# Altium PCB RF-UNIT.PcbDoc (part 4 of 4)
Units mm, origin at the board's own origin, x right, y up, seen from the top; angles counter-clockwise.
Board outline 187 x 77 mm, 2 copper layers (Top Layer, Top, Bottom Layer, Bottom); 271 components, 171 nets, 804 pads, 2169 vias.
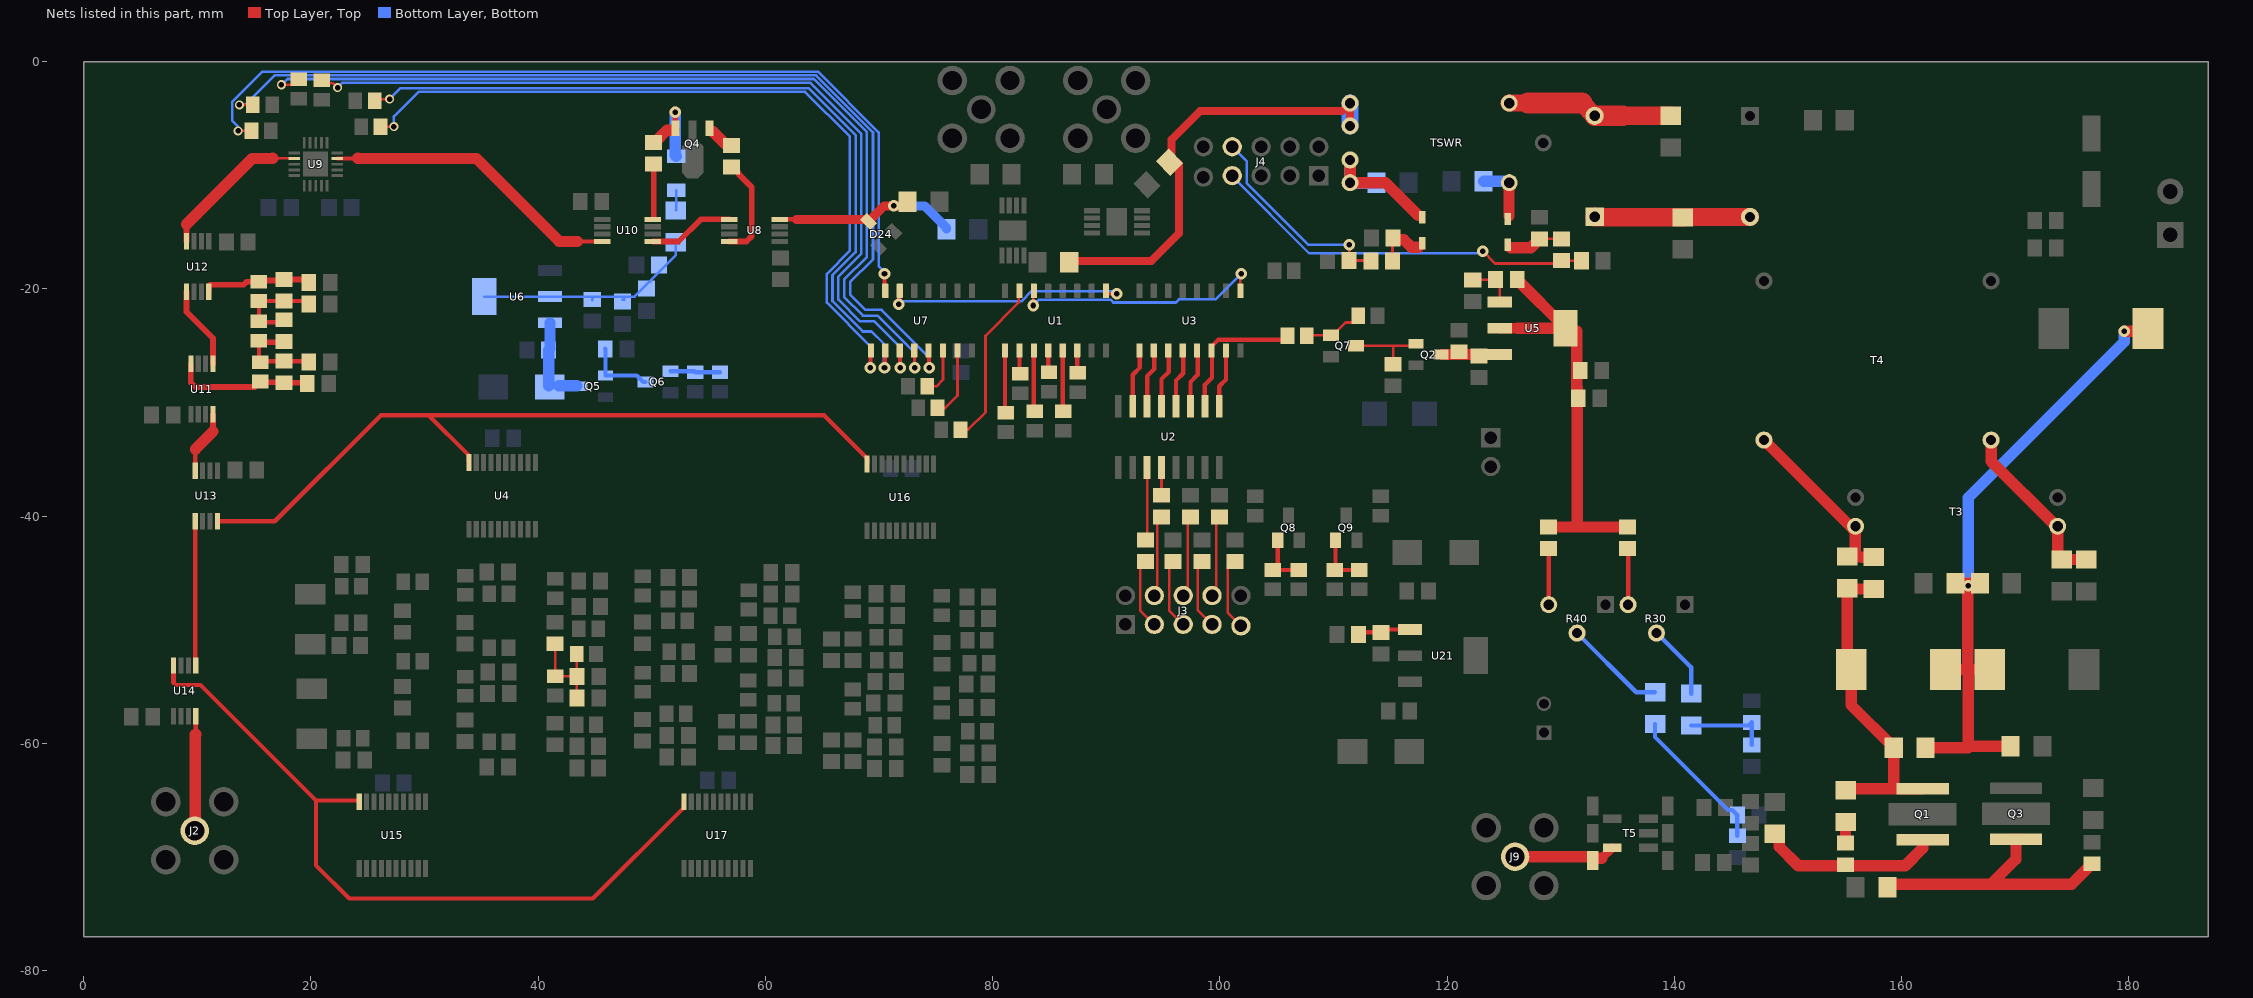
[diagram p4: the nets of this part, all layers, seen from the top]

## Via types
v1: diameter 0.5, hole 0.3, Top Layer, Top to Bottom Layer, Bottom, tented both sides, 1697 vias
v2: diameter 0.5, hole 0.3, Top Layer, Top to Bottom Layer, Bottom, 318 vias
v3: diameter 1.016, hole 0.486, Top Layer, Top to Bottom Layer, Bottom, tented both sides, 136 vias
v4: diameter 0.8, hole 0.486, Top Layer, Top to Bottom Layer, Bottom, tented both sides, 12 vias
v5: diameter 4, hole 3, Top Layer, Top to Bottom Layer, Bottom, 4 vias
v6: diameter 3.2, hole 3, Top Layer, Top to Bottom Layer, Bottom, 2 vias

## Nets (pads, with @x,y where several pads share a name; then routed paths per layer and width w, separated by ;. In a path a pad name is that pad's centre, name@x,y a point inside that pad or via, vN(x,y) a via of type N, cw(c..) or ccw(c..) an arc to the next point about the centre after c; other vN are vias at no path point) (continued)
NetC91_1: C91.1 C92.1 C111.2 L37.1 Q1.1 R48.2 | length 28.8
  Top Layer, Top w1: C111.2@154.778,-64.132 154.918,-63.993 159.306,-63.993 ; C92.1@157.533,-46.408 155.28,-46.408 C91.1@155.219,-46.346 155.219,-53.152 L37.1@155.562,-53.496 155.562,-56.627 R48.2@159.306,-60.371 159.306,-63.993 ; Q1.1@161.852,-63.993 159.306,-63.993
NetC91_2: C91.2 C92.2 T3.4 T4.1 | length 15.4
  Top Layer, Top w0.381: C91.2@155.881,-43.577 C91.2@155.929,-43.53 ; T3.4@155.929,-40.921 T3.4@155.956,-40.894
  Top Layer, Top w1: T4.1@147.881,-33.302 T3.4@155.714,-41.136 ; C91.2@155.881,-43.577 156.544,-43.608 C92.2@157.533,-43.608 ; C91.2@155.929,-43.53 T3.4@155.929,-40.921
NetC93_2: C93.2 C94.2 T3.1 T4.3 | length 15.4
  Top Layer, Top w0.381: C94.2@173.736,-43.441 C94.2@174.108,-43.813
  Top Layer, Top w1: T4.3@167.881,-33.302 167.881,-35.166 173.609,-40.894 T3.1@173.609,-41.148 ; C94.2@173.736,-43.441 T3.1@173.736,-40.894 ; C94.2@174.108,-43.813 176.241,-43.813 C93.2@176.257,-43.829
NetC95_1: C95.1 C105.1 L37.2 L38.1 L43.1 R47.2 R48.1 | length 58.6
  Top Layer, Top w1: R48.1@162.106,-60.371 165.853,-60.371 165.853,-60.246 ; L37.2@163.862,-53.496 165.853,-53.496 ; C95.1@164.738,-45.911 164.751,-45.898 v3@165.813,-45.898 ; v3(165.853,-46.131) 165.844,-46.08 v3@165.813,-45.898 ; C105.1@166.891,-45.898 v3@165.813,-45.898 ; L38.1@167.748,-53.491 167.743,-53.496 166.068,-53.496 ; R47.2@169.592,-60.246 165.853,-60.246 ; v3(179.584,-23.716) 181.449,-23.716 L43.1@181.685,-23.481 ; v3@165.813,-45.898 165.813,-53.24 166.068,-53.496 ; 165.853,-60.246 165.853,-53.496 ; 165.853,-53.496 166.068,-53.496
  Bottom Layer, Bottom w1: v3(165.853,-46.131) 165.853,-38.394 179.584,-24.664 v3(179.584,-23.716)
NetC101_1: C101.1 C102.2 C107.2 L40.2 L41.1 | length 8.5
  Top Layer, Top w0.381: C102.2@17.653,-22.926 15.496,-22.926 L41.1@15.43,-22.86 L40.2@15.43,-21.068 17.651,-21.068 C101.1@17.653,-21.07 19.406,-21.07 C107.2@19.739,-21.402
NetC101_2: C101.2 C104.2 L40.1 U12.8 | length 9.6
  Top Layer, Top w0.5: U12.8@11.008,-20.259 11.008,-19.759 11.118,-19.649 14.079,-19.649 14.361,-19.367 L40.1@15.43,-19.367 15.529,-19.269 17.554,-19.269 C101.2@17.653,-19.17 19.543,-19.17 C104.2@19.805,-19.431
NetC102_1: C102.1 C103.2 C108.2 L41.2 L42.1 | length 8.5
  Top Layer, Top w0.381: L41.2@15.43,-24.56 15.43,-26.352 15.433,-26.355 C103.2@17.651,-26.355 19.744,-26.355 C108.2@19.805,-26.416
  Top Layer, Top w0.5: L41.2@15.43,-24.56 15.563,-24.693 17.52,-24.693 C102.1@17.653,-24.826
NetC103_1: C103.1 C110.2 L42.2 U11.8 | length 12.3
  Top Layer, Top w0.5: U11.8@9.439,-26.604 9.439,-28.235 9.844,-28.64 15.048,-28.64 L42.2@15.533,-28.155 15.583,-28.205 17.601,-28.205 C103.1@17.651,-28.255 19.612,-28.255 C110.2@19.678,-28.321
NetC111_1: C111.1 R32.2 | length 0.4
  Top Layer, Top w1: 155.067,-68.084 C111.1@155.067,-67.701
NetC112_1: C112.1 Q4.1 | length 2.1
  Top Layer, Top w1: Q4.1@55.419,-6.176 55.419,-6.201 56.446,-7.228 56.873,-7.228 C112.1@57.023,-7.378
NetC112_2: C112.2 U8.8 | length 9
  Top Layer, Top w0.5: U8.8@56.83,-15.834 58.334,-15.834 58.801,-15.367 58.801,-11.056 57.658,-9.913 57.658,-9.813 57.123,-9.278 C112.2@57.023,-9.278
NetC113_1: C113.1 D1.1 R49.1 | length 4.8
  Top Layer, Top w0.23: C113.1@128.132,-15.604 130.071,-15.604 R49.1@130.078,-15.611
  Top Layer, Top w1: D1.1@125.603,-16.377 127.359,-16.377 C113.1@128.132,-15.604
NetC114_1: C114.1 D18.1 R27.1 | length 7.4
  Bottom Layer, Bottom w0.381: D18.1@141.478,-58.423 146.543,-58.423 C114.1@146.812,-58.154 R27.1@146.812,-60.137
NetC116_1: C116.1 D23.1 R44.1 | length 13.1
  Bottom Layer, Bottom w0.381: D23.1@138.303,-58.296 138.303,-59.436 144.726,-65.859 145.095,-65.859 145.542,-66.306 R44.1@145.542,-68.138
NetC117_2: C117.2 D3.1 R50.1 | length 4.6
  Top Layer, Top w0.23: R50.1@115.196,-17.542 115.196,-15.573 C117.2@115.236,-15.533
  Top Layer, Top w1: C117.2@115.236,-15.533 115.236,-15.649 116.169,-15.649 116.846,-16.325 117.452,-16.325
NetC120_1: C120.1 U10.8 | length 4.9
  Top Layer, Top w0.23: U10.8@50.104,-13.884 U10.8@50.165,-13.823
  Top Layer, Top w0.5: U10.8@50.165,-13.823 C120.1@50.165,-9.005
NetC120_2: C120.2 L46.2 Q4.3 | length 7.5
  Top Layer, Top w0.5: Q4.3@52.073,-5.831 v3@52.073,-4.448
  Top Layer, Top w1: C120.2@50.165,-7.105 50.265,-7.105 51.343,-6.027 Q4.3@51.944,-6.027 ; v3(52.07,-4.445) v3@52.073,-4.448
  Bottom Layer, Bottom w1: v3(52.07,-4.445) 52.073,-4.448 52.073,-8.237 L46.2@52.157,-8.322
NetC121_2: C121.2 C122.2 C127.2 C133.2 R39.1 U6.2 U6.4 | length 20.3
  Bottom Layer, Bottom w0.23: U6.4@35.246,-20.68 C133.2@44.86,-20.68 ; C133.2@44.751,-20.981 44.751,-20.946 C133.2@44.765,-20.932 C133.2@44.86,-20.68 ; C121.2@47.416,-20.957 47.586,-20.957 C121.2@47.586,-20.68 ; C122.2@49.842,-19.363 C122.2@49.842,-19.324 ; C127.2@51.216,-17.943 C127.2@51.222,-17.943 ; R39.1@52.111,-15.892 52.111,-17.054 C127.2@51.222,-17.943 ; C133.2@44.86,-20.68 C121.2@47.586,-20.68 ; C121.2@47.586,-20.68 48.485,-20.68 C122.2@49.842,-19.324 ; C122.2@49.842,-19.324 C127.2@51.222,-17.943
NetC124_2: C124.2 L44.2 L45.1 | length 21.5
  Top Layer, Top w1.6: C124.2@140.74,-13.711 132.988,-13.711 L45.1@132.988,-13.659 L44.2@146.654,-13.665
NetC126_2: C126.2 C136.2 Q2.3 U5.3 | length 7
  Top Layer, Top w0.23: Q2.3@119.577,-25.77 119.843,-25.503 C126.2@121.404,-25.503 ; U5.3@124.617,-25.77 U5.3@124.624,-25.763
  Top Layer, Top w1: Q2.3@119.577,-25.77 121.404,-25.77 122.809,-25.77 123.063,-25.77 U5.3@124.617,-25.77
NetC128_1: C128.1 C137.1 R28.2 R29.2 R52.1 U5.2 U5.4 | length 37.1
  Top Layer, Top w0.95: U5.2@124.624,-23.463 126.199,-23.463
  Top Layer, Top w1: 126.199,-23.463 U5.4@130.424,-23.463 ; R52.1@126.212,-19.239 130.424,-23.451 U5.4@130.424,-23.463 ; R29.2@128.905,-40.96 131.445,-40.96 ; R28.2@135.89,-40.96 131.445,-40.96 ; U5.4@130.424,-23.463 130.67,-23.709 131.421,-23.709 131.421,-27.178 131.421,-28.674 131.443,-28.674 131.444,-35.56 131.444,-40.959 131.445,-40.96
NetC129_1: C129.1 C130.2 Q5.3 U6.3 | length 7.3
  Bottom Layer, Bottom w0.381: C129.1@41.815,-28.638 C129.1@41.815,-28.524
  Bottom Layer, Bottom w0.95: 41.046,-23.955 U6.3@41.046,-22.98
  Bottom Layer, Bottom w1: C129.1@40.92,-28.522 C130.2@40.92,-25.387 41.046,-25.261 41.046,-23.955 ; C129.1@41.815,-28.524 Q5.3@43.401,-28.524
NetD1_2: D1.2 R56.1 TSWR.3 | length 5.2
  Top Layer, Top w1: D1.2@125.452,-13.577 125.452,-10.653 TSWR.3@125.466,-10.653
  Bottom Layer, Bottom w1: R56.1@123.227,-10.525 125.339,-10.525 TSWR.3@125.466,-10.653
NetD3_2: D3.2 R55.1 TSWR.4 TSWR.6 | length 13.5
  Top Layer, Top w1: TSWR.6@111.466,-8.653 TSWR.4@111.466,-10.653 114.579,-10.653 117.452,-13.525
  Bottom Layer, Bottom w1: TSWR.6@111.466,-8.653 TSWR.4@111.466,-10.653 111.538,-10.725 R55.1@113.762,-10.725
NetD18_2: D18.2 R30.2 | length 6.6
  Bottom Layer, Bottom w0.381: R30.2@138.43,-50.257 141.478,-53.305 D18.2@141.478,-55.623
NetD23_2: D23.2 R40.2 | length 9
  Bottom Layer, Bottom w0.381: R40.2@131.445,-50.292 136.649,-55.496 D23.2@138.303,-55.496
NetJ3_3: J3.3 R3.1 | length 6.3
  Top Layer, Top w0.23: R3.1@93.472,-44.003 93.453,-44.003 92.993,-44.463 92.993,-48.289 J3.3@94.234,-49.53
NetJ3_4: J3.4 R7.1 | length 7.2
  Top Layer, Top w0.23: J3.4@94.234,-46.99 94.234,-46.633 94.501,-46.366 94.501,-40.434 R7.1@94.869,-40.066
NetJ3_5: J3.5 R8.1 | length 6.4
  Top Layer, Top w0.23: R8.1@96.139,-44.003 96.039,-44.003 95.533,-44.509 95.533,-48.289 J3.5@96.774,-49.53
NetJ3_6: J3.6 R9.1 | length 7.2
  Top Layer, Top w0.23: J3.6@96.774,-46.99 96.774,-46.633 97.168,-46.239 97.168,-40.307 R9.1@97.409,-40.066
NetJ3_7: J3.7 R10.1 | length 6.4
  Top Layer, Top w0.23: R10.1@98.679,-44.003 98.579,-44.003 98.119,-44.463 98.119,-44.563 98.044,-44.638 98.044,-48.26 J3.7@99.314,-49.53
NetJ3_8: J3.8 R11.1 | length 7.2
  Top Layer, Top w0.23: J3.8@99.314,-46.99 99.314,-46.633 99.695,-46.252 99.695,-40.32 R11.1@99.949,-40.066
NetJ3_9: J3.9 R12.1 | length 6.5
  Top Layer, Top w0.23: R12.1@101.346,-44.003 101.246,-44.003 100.689,-44.56 100.689,-48.492 J3.9@101.854,-49.657
NetL46_1: L46.1 R39.2 | length 1.8
  Bottom Layer, Bottom w0.23: R39.2@52.111,-13.092 52.157,-13.045 L46.1@52.157,-11.322
NetQ1_3: Q1.3 R32.1 R34.2 | length 16
  Top Layer, Top w1: R34.2@149.225,-67.818 149.225,-69.088 150.908,-70.771 154.796,-70.771 155.067,-70.771 160.317,-70.771 161.852,-69.237 Q1.3@161.852,-68.493
NetQ2_1: Q2.1 Q7.3 R41.1 | length 7
  Top Layer, Top w0.23: Q7.3@111.971,-25.019 115.316,-25.019 ; R41.1@115.259,-26.632 115.259,-25.076 115.316,-25.019 ; Q2.1@117.039,-24.606 116.835,-24.811 116.835,-25.019 115.316,-25.019
NetQ3_3: Q3.3 R38.2 R46.1 | length 32.7
  Top Layer, Top w1: Q3.3@170.076,-68.453 170.076,-70.189 167.88,-72.385 ; R46.1@176.765,-70.599 174.978,-72.385 167.88,-72.385 ; 167.88,-72.385 158.75,-72.39 167.88,-72.385
NetQ5_1: Q5.1 Q6.3 R57.1 | length 6.1
  Bottom Layer, Bottom w0.381: R57.1@45.913,-25.273 45.931,-25.291 Q5.1@45.931,-27.625 48.677,-27.625 49.246,-28.194 Q6.3@49.446,-28.194
NetQ6_1: Q6.1 R31.1 R33.2 | length 4.4
  Bottom Layer, Bottom w0.381: Q6.1@51.646,-27.244 53.748,-27.244 R33.2@53.848,-27.344 R31.1@56.007,-27.344
NetQ7_1: Q7.1 R37.1 R45.2 | length 5.3
  Top Layer, Top w0.23: R37.1@107.657,-24.13 107.718,-24.069 Q7.1@109.771,-24.069 109.971,-24.069 111.078,-22.962 111.695,-22.962 112.18,-22.477 R45.2@112.18,-22.352
NetQ8_1: Q8.1 R65.1 R70.2 | length 5.1
  Top Layer, Top w0.381: R65.1@104.648,-44.743 R65.1@104.685,-44.743 ; Q8.1@105.095,-42.121 105.095,-44.333 R65.1@104.685,-44.743 ; R70.2@106.934,-44.743 R65.1@104.685,-44.743
NetQ9_1: Q9.1 R5.1 R6.2 | length 4.8
  Top Layer, Top w0.381: Q9.1@110.175,-42.121 110.175,-44.677 R5.1@110.109,-44.743 R6.2@112.268,-44.743
NetR1_1: R1.1 R2.1 U21.1 | length 4.7
  Top Layer, Top w0.381: R2.1@112.202,-50.419 112.39,-50.231 R1.1@114.173,-50.231 114.422,-49.982 U21.1@116.734,-49.982
NetR28_1: R28.1 R30.3 | length 4.9
  Top Layer, Top w0.381: R28.1@135.89,-42.86 135.93,-42.9 R30.3@135.93,-47.757
NetR29_1: R29.1 R40.3 | length 4.9
  Top Layer, Top w0.381: R29.1@128.905,-42.86 128.945,-42.9 R40.3@128.945,-47.792
NetR52_2: R52.2 R53.1 U5.1 | length 4.1
  Top Layer, Top w0.23: R53.1@122.258,-19.207 124.279,-19.207 124.312,-19.239 124.624,-19.551 U5.1@124.624,-21.163
NetR71_2: R71.2 U1.15 | length 14.3
  Top Layer, Top w0.23: R71.2@77.177,-32.385 77.851,-32.385 79.375,-30.861 79.375,-24.129 82.296,-21.208 U1.15@82.296,-20.584
NetR72_2: R72.2 U1.1 | length 5.5
  Top Layer, Top w0.381: U1.1@81.093,-25.418 81.093,-30.84 R72.2@81.153,-30.9
NetR73_2: R73.2 U1.2 | length 2.1
  Top Layer, Top w0.381: U1.2@82.363,-25.418 82.363,-27.411 R73.2@82.423,-27.471
NetR74_2: R74.2 U1.3 | length 5.4
  Top Layer, Top w0.381: U1.3@83.633,-25.418 83.633,-30.713 R74.2@83.693,-30.773
NetR75_2: R75.2 U1.4 | length 2
  Top Layer, Top w0.381: U1.4@84.903,-25.418 84.903,-27.284 R75.2@84.963,-27.344
NetR76_2: R76.2 U1.5 | length 5.4
  Top Layer, Top w0.381: U1.5@86.173,-25.418 86.173,-30.713 R76.2@86.233,-30.773
NetR77_2: R77.2 U1.6 | length 2
  Top Layer, Top w0.381: U1.6@87.443,-25.418 87.443,-27.323 R77.2@87.503,-27.383
NetR78_2: R78.2 U7.15 | length 78.3
  Top Layer, Top w0.23: v4(13.589,-6.096) R78.2@14.771,-6.096
  Top Layer, Top w0.381: v3(70.485,-18.669) 70.485,-20.095 U7.15@70.558,-20.168
  Bottom Layer, Bottom w0.23: v4(13.589,-6.096) 13.589,-5.715 13.074,-5.2 13.074,-3.544 15.729,-0.889 64.643,-0.889 69.977,-6.223 69.977,-17.971 70.485,-18.479 v3(70.485,-18.669)
NetR79_2: R79.2 U7.1 | length 68.9
  Top Layer, Top w0.23: R79.2@26.123,-5.715 v4(27.305,-5.715)
  Top Layer, Top w0.381: v3@69.252,-26.887 U7.1@69.252,-25.455
  Bottom Layer, Bottom w0.23: v4(27.305,-5.715) 27.305,-4.826 29.477,-2.654 63.487,-2.654 67.437,-6.604 67.437,-16.637 65.405,-18.669 65.405,-21.209 69.215,-25.019 v3(69.215,-26.924)
NetR80_2: R80.2 U7.2 | length 69.3
  Top Layer, Top w0.23: R80.2@25.615,-3.429 25.742,-3.302 v4(26.924,-3.302)
  Top Layer, Top w0.381: v3@70.522,-26.583 70.522,-25.455 U7.2@70.558,-25.418
  Bottom Layer, Bottom w0.23: v4(26.924,-3.302) 27.891,-2.335 63.803,-2.335 67.945,-6.477 67.945,-16.764 65.913,-18.796 65.913,-21.082 68.58,-23.749 69.342,-23.749 70.419,-24.826 70.419,-26.858 v3(70.485,-26.924)
NetR81_2: R81.2 U7.3 | length 75.8
  Top Layer, Top w0.23: R81.2@20.955,-1.651 21.209,-1.905 21.971,-1.905 v4(22.352,-2.286)
  Top Layer, Top w0.381: U7.3@71.828,-25.418 71.855,-25.445 71.855,-26.897 v3(71.882,-26.924)
  Bottom Layer, Bottom w0.23: v4(22.352,-2.286) 22.792,-1.846 63.949,-1.846 68.453,-6.35 68.453,-16.891 66.421,-18.923 66.421,-20.955 68.326,-22.86 69.596,-22.86 71.882,-25.146 v3(71.882,-26.924)
NetR82_2: R82.2 U7.4 | length 81.8
  Top Layer, Top w0.23: v4(17.399,-2.032) 18.376,-2.032 18.884,-1.524 R82.2@18.923,-1.563 ; U7.4@73.098,-25.418 73.125,-25.445 73.125,-26.897 v3(73.152,-26.924)
  Bottom Layer, Bottom w0.23: v4(17.399,-2.032) 17.442,-2.032 17.947,-1.527 64.265,-1.527 68.926,-6.188 68.926,-17.18 66.929,-19.177 66.929,-20.701 68.58,-22.352 69.85,-22.352 73.152,-25.654 v3(73.152,-26.924)
NetR83_2: R83.2 U7.5 | length 86.8
  Top Layer, Top w0.23: v4(13.716,-3.81) R83.2@14.898,-3.81
  Top Layer, Top w0.381: U7.5@74.368,-25.418 74.395,-25.445 v3@74.395,-26.897
  Bottom Layer, Bottom w0.23: v4(13.716,-3.81) 14.205,-3.81 16.807,-1.208 64.454,-1.208 69.469,-6.223 69.469,-17.399 67.468,-19.4 67.468,-20.478 68.834,-21.844 70.231,-21.844 74.422,-26.035 v3(74.422,-26.924)
NetR84_2: R84.2 U7.6 | length 4.2
  Top Layer, Top w0.23: R84.2@74.256,-28.575 75.057,-28.575 75.638,-27.994 U7.6@75.638,-25.418
NetR85_2: R85.2 U7.7 | length 6.2
  Top Layer, Top w0.23: R85.2@75.145,-30.48 75.819,-30.48 76.908,-29.391 U7.7@76.908,-25.418
NetU1_9: U1.9 U7.14 | length 22.1
  Top Layer, Top w0.23: U1.9@89.983,-20.168 89.983,-20.287 90.143,-20.447 v3(90.932,-20.447)
  Top Layer, Top w0.381: v3(71.755,-21.336) 71.792,-21.299 71.792,-20.205 U7.14@71.828,-20.168
  Bottom Layer, Bottom w0.23: v3(71.755,-21.336) 71.997,-21.094 82.538,-21.094 83.439,-20.193 90.678,-20.193 v3(90.932,-20.447)
NetU1_14: U1.14 U3.9 | length 22.5
  Top Layer, Top w0.23: v3(83.566,-21.463) 83.566,-20.16 U1.14@83.633,-20.093 ; U3.9@101.807,-20.093 101.807,-18.738 v3(101.868,-18.676)
  Bottom Layer, Bottom w0.23: v3(83.566,-21.463) 84.074,-20.955 90.379,-20.955 90.621,-21.197 96.136,-21.197 96.405,-20.928 99.617,-20.928 v3(101.868,-18.676)
NetU2_1: U2.1 U3.7 | length 5.1
  Top Layer, Top w0.381: U2.1@99.949,-30.32 99.949,-28.575 100.537,-27.987 U3.7@100.537,-25.418
NetU2_3: U2.3 U3.5 | length 5.2
  Top Layer, Top w0.381: U2.3@97.409,-30.32 97.409,-28.194 98.044,-27.559 98.044,-25.465 U3.5@97.997,-25.418
NetU2_4: U2.4 U3.4 | length 5.2
  Top Layer, Top w0.381: U2.4@96.139,-30.32 96.139,-28.067 96.774,-27.432 96.774,-25.465 U3.4@96.727,-25.418
NetU2_5: U2.5 U3.3 | length 5.2
  Top Layer, Top w0.381: U2.5@94.869,-30.32 94.869,-27.94 95.504,-27.305 95.504,-25.465 U3.3@95.457,-25.418
NetU2_6: U2.6 U3.2 | length 5.2
  Top Layer, Top w0.381: U2.6@93.599,-30.32 93.599,-27.686 94.234,-27.051 94.234,-25.465 U3.2@94.187,-25.418
NetU2_7: U2.7 U3.1 | length 5.2
  Top Layer, Top w0.381: U2.7@92.329,-30.32 92.329,-27.559 92.964,-26.924 92.964,-25.465 U3.1@92.917,-25.418
NetU4_10: U4.10 U13.8 U16.10 | length 68.8
  Top Layer, Top w0.381: U13.8@11.77,-40.452 16.825,-40.452 26.162,-31.115 30.353,-31.115 ; U4.10@33.905,-35.289 33.905,-34.667 30.353,-31.115 ; U16.10@68.957,-35.416 68.957,-34.903 65.169,-31.115 30.353,-31.115
NetU8_5: U8.5 U10.5 | length 7.5
  Top Layer, Top w0.5: U10.5@50.104,-15.834 52.365,-15.834 54.315,-13.884 U8.5@56.83,-13.884
NetU11_5: U11.5 U12.5 | length 7.3
  Top Layer, Top w0.5: U12.5@9.058,-20.259 9.058,-22.012 11.389,-24.343 U11.5@11.389,-26.604
NetU13_5: U13.5 U14.5 | length 12.7
  Top Layer, Top w0.381: U14.5@9.82,-53.147 U13.5@9.82,-40.452
NetU14_8: U14.8 U15.10 U17.10 | length 65.4
  Top Layer, Top w0.381: 7.915,-54.651 8.128,-54.864 10.287,-54.864 20.447,-65.024 ; U15.10@24.253,-65.134 24.253,-65.059 24.218,-65.024 20.447,-65.024 ; U17.10@52.828,-65.134 52.828,-65.647 44.815,-73.66 23.368,-73.66 20.447,-70.739 20.447,-65.024
  Top Layer, Top w0.45: 7.915,-54.651 U14.8@7.915,-53.147
PTT_OUT: R3.2 U2.11 | length 6.4
  Top Layer, Top w0.23: R3.2@93.472,-42.103 93.599,-41.976 U2.11@93.599,-35.72
RF_TX_IN: J9.5 T5.6 T5.10 | length 9
  Top Layer, Top w0.381: T5.6@132.875,-69.977 T5.6@133.02,-70.122
  Top Layer, Top w0.76: 133.6,-70.122 T5.10@134.537,-69.185
  Top Layer, Top w1: J9.5@125.984,-69.977 T5.6@132.875,-69.977 ; T5.6@133.02,-70.122 133.6,-70.122
RX_ATT_LPF: U9.2 U12.4 | length 13.4
  Top Layer, Top w0.23: 16.637,-8.509 U9.2@18.522,-8.529
  Top Layer, Top w0.5: U12.4@9.058,-15.809 9.058,-14.31
  Top Layer, Top w1: 9.058,-14.31 9.906,-13.462 14.839,-8.529 16.637,-8.509
RX_BPF_OUT: J2.5 U14.4 | length 10.2
  Top Layer, Top w0.381: J2.5@9.758,-67.67 J2.5@9.779,-67.691 J2.5@9.83,-67.64 ; 9.865,-59.182 U14.4@9.865,-57.597
  Top Layer, Top w1: J2.5@9.83,-67.64 9.83,-59.217 9.865,-59.182
RX_IN_LNA: C8.2 C10.2 D24.3 U8.4 | length 16.7
  Top Layer, Top w0.381: U8.4@61.28,-13.884 62.738,-13.884
  Top Layer, Top w0.8: 62.738,-13.884 D24.3@68.543,-13.884 ; D24.3@68.913,-13.922 D24.3@69.072,-14.081 70.461,-12.692 v3(71.299,-12.692) C8.2@72.136,-12.692
  Bottom Layer, Bottom w0.8: v3(71.299,-12.692) 74.003,-12.692 75.943,-14.632 C10.2@75.943,-14.732
RX_LNA_ATT: U9.14 U10.4 | length 26.4
  Top Layer, Top w0.381: U9.14@22.322,-8.529 24.13,-8.509 ; 43.434,-15.834 U10.4@45.654,-15.834
  Top Layer, Top w1: 24.13,-8.509 34.564,-8.529 41.869,-15.834 43.434,-15.834
RX_LPF_BPF: U11.4 U13.4 | length 5.6
  Top Layer, Top w0.381: U13.4@9.82,-36.002 9.82,-34.122 9.842,-34.1
  Top Layer, Top w0.5: 11.389,-32.553 U11.4@11.389,-31.054
  Top Layer, Top w1: 9.842,-34.1 11.389,-32.553
SWR_DET_BACKW: J4.8 R50.2 R54.2 | length 18.3
  Top Layer, Top w0.089: R54.2@111.377,-17.501 R54.2@111.379,-17.498
  Top Layer, Top w0.23: R54.2@111.377,-17.501 113.255,-17.501 R50.2@113.296,-17.542 ; R54.2@111.379,-17.498 v3(111.379,-16.129)
  Bottom Layer, Bottom w0.23: J4.8@101.092,-7.493 102.362,-8.763 102.362,-10.668 107.823,-16.129 v3(111.379,-16.129)
SWR_DET_FORW: J4.7 R36.1 R49.2 | length 34.4
  Top Layer, Top w0.23: v3(123.14,-16.677) 124.225,-17.763 130.078,-17.763 R49.2@130.078,-17.511 130.09,-17.523 R36.1@131.823,-17.523
  Bottom Layer, Bottom w0.23: J4.7@101.092,-10.033 101.092,-10.103 107.868,-16.879 122.725,-16.879 122.927,-16.677 v3(123.14,-16.677)
SWR_OUT: C17.2 C18.2 TSWR.2 TSWR.5 | length 39.9
  Top Layer, Top w0.381: C18.2@95.561,-8.837 C18.2@95.575,-8.851 C18.2@96.227,-8.851
  Top Layer, Top w0.7: C17.2@86.744,-17.272 86.998,-17.526 93.98,-17.526 96.393,-15.113 96.393,-9.017 C18.2@96.227,-8.851 ; C18.2@95.758,-8.001 95.758,-6.858 98.253,-4.363 110.756,-4.363 TSWR.2@111.466,-3.653 TSWR.5@111.466,-5.653
  Bottom Layer, Bottom w1.5: TSWR.5@111.466,-5.653 TSWR.2@111.466,-3.653
TUNE_OUT: R7.2 U2.12 | length 2.4
  Top Layer, Top w0.23: R7.2@94.869,-38.166 U2.12@94.869,-35.72
TX_LPF_OUT: C125.2 L45.2 TSWR.1 | length 14.7
  Top Layer, Top w1.5: TSWR.1@125.466,-3.653 127.131,-3.653
  Top Layer, Top w1.6: 131.872,-3.653 L45.2@132.988,-4.769 ; 135.43,-4.757 C125.2@139.689,-4.757
  Top Layer, Top w1.83: 127.131,-3.653 131.872,-3.653 ; L45.2@132.988,-4.769 135.419,-4.769 135.43,-4.757
TXAMP: R37.2 U2.2 U3.6 | length 13
  Top Layer, Top w0.381: U2.2@98.679,-30.32 98.679,-28.448 99.314,-27.813 99.314,-25.465 U3.6@99.267,-25.418 99.267,-25.068 99.873,-24.462 105.625,-24.462 105.625,-24.6 106.152,-24.6 R37.2@106.289,-24.462
"Сеть 105": C20.1 C23.2 C26.2 L10.2 L13.1 | length 8.6
  Top Layer, Top w0.23: C20.1@41.504,-51.235 L13.1@41.504,-54.092 43.357,-54.092 C23.2@43.409,-54.041 ; L10.2@43.389,-52.136 43.409,-52.156 C23.2@43.409,-54.041 ; C26.2@43.409,-55.946 C23.2@43.409,-54.041
pads on no net: T5.5 U1.7 U7.9

## Polygon pours and split planes (outlines as drawn)
GND on Top Layer, Top "Bottom Layer, Bottom-GND" (solid, remove dead copper, pour order 10): 0,0 186.939,0 186.939,-77.061 0,-77
NetC128_1 on Top Layer, Top "Top Layer, Top-Сеть 31" (solid, pour order 0): 127,-21 127,-26 134,-26 134,-21
GND on Bottom Layer, Bottom "Bottom Layer, Bottom-GND" (solid, remove dead copper, pour order 6): 0,-0.206 186.939,-0.206 186.939,-77 0,-77
NetC121_2 on Bottom Layer, Bottom "Bottom Layer, Bottom-Сеть 141" (solid, pour order 4): 29,-16 29,-24 39,-24 39,-16

## Keep-outs
Keep-Out Layer, Board:
  lines w0.127: 0,-77.088 0,0 187,0 187,-77
  lines w0.14: 0,-77.088 186.999,-77.088 ; 0,-77 0,0 187,0 187,-77

## Silkscreen, mask and mechanical layers (free items; w line width, h text height)
Top Overlay, Top Silk:
  region: 110.207,-7.193 110.202,-7.248 110.188,-7.302 110.164,-7.352 110.132,-7.397 110.093,-7.436 110.048,-7.468 109.998,-7.491 109.944,-7.506 109.889,-7.511 109.834,-7.506 109.781,-7.491 109.73,-7.468 109.685,-7.436 109.646,-7.397 109.614,-7.352 109.591,-7.302 109.577,-7.248 109.572,-7.193 109.577,-7.138 109.591,-7.085 109.614,-7.034 109.646,-6.989 109.685,-6.95 109.73,-6.918 109.781,-6.895 109.834,-6.88 109.889,-6.876 109.944,-6.88 109.998,-6.895 110.048,-6.918 110.093,-6.95 110.132,-6.989 110.164,-7.034 110.188,-7.085 110.202,-7.138 110.207,-7.193
  text "LNA" at 42.121,-7.084 h2.08
  text "ATT" at 22.225,-14.224 h2.08
  text "LPF" at 5.309,-26.521 h2.08 r90
  text "BPF" at 5.08,-50.8 h2.08 r90
  text "UA3REO" at 145.161,-52.959 h2.08 r90
  text "RF-UNIT rev14" at 147.447,-53.34 h1.25 r90
  text "HPF" at 27.432,-62.738 h1.67
  text "2m" at 20.574,-65.151 h2 r90
  text "40" at 61.976,-66.04 h2.08 r90
  text "30" at 51.435,-67.183 h2.08 r90
  text "80" at 69.723,-68.707 h2.08 r90
  text "160" at 78.613,-70.485 h2.08 r90
  text "20,17" at 45.085,-71.12 h1.67 r90
  text "15,12,10" at 36.957,-74.422 h1.67 r90
  text "ADC" at 7.112,-74.803 h2.08
  text "DAC" at 130.937,-75.565 h2.08
Bottom Overlay, Bot Silk:
  rectangle: 101.727,-12.065 105.029,-11.303

## Text inside footprints (layer, text, board x,y; h text height)
FAN_OUT: Mechanical 1, Top Assy "BOARD EDGE" at 125.479,-32.183 h0.42 r270